# Altium PCB Test.PcbDoc (part 8 of 9)
Units mm, origin at the board's own origin, x right, y up, seen from the top; angles counter-clockwise.
Board outline 152.4 x 101.6 mm, 2 copper layers (Top Layer, Bottom Layer); 1 components, 0 nets, 1713 pads, 1 vias.
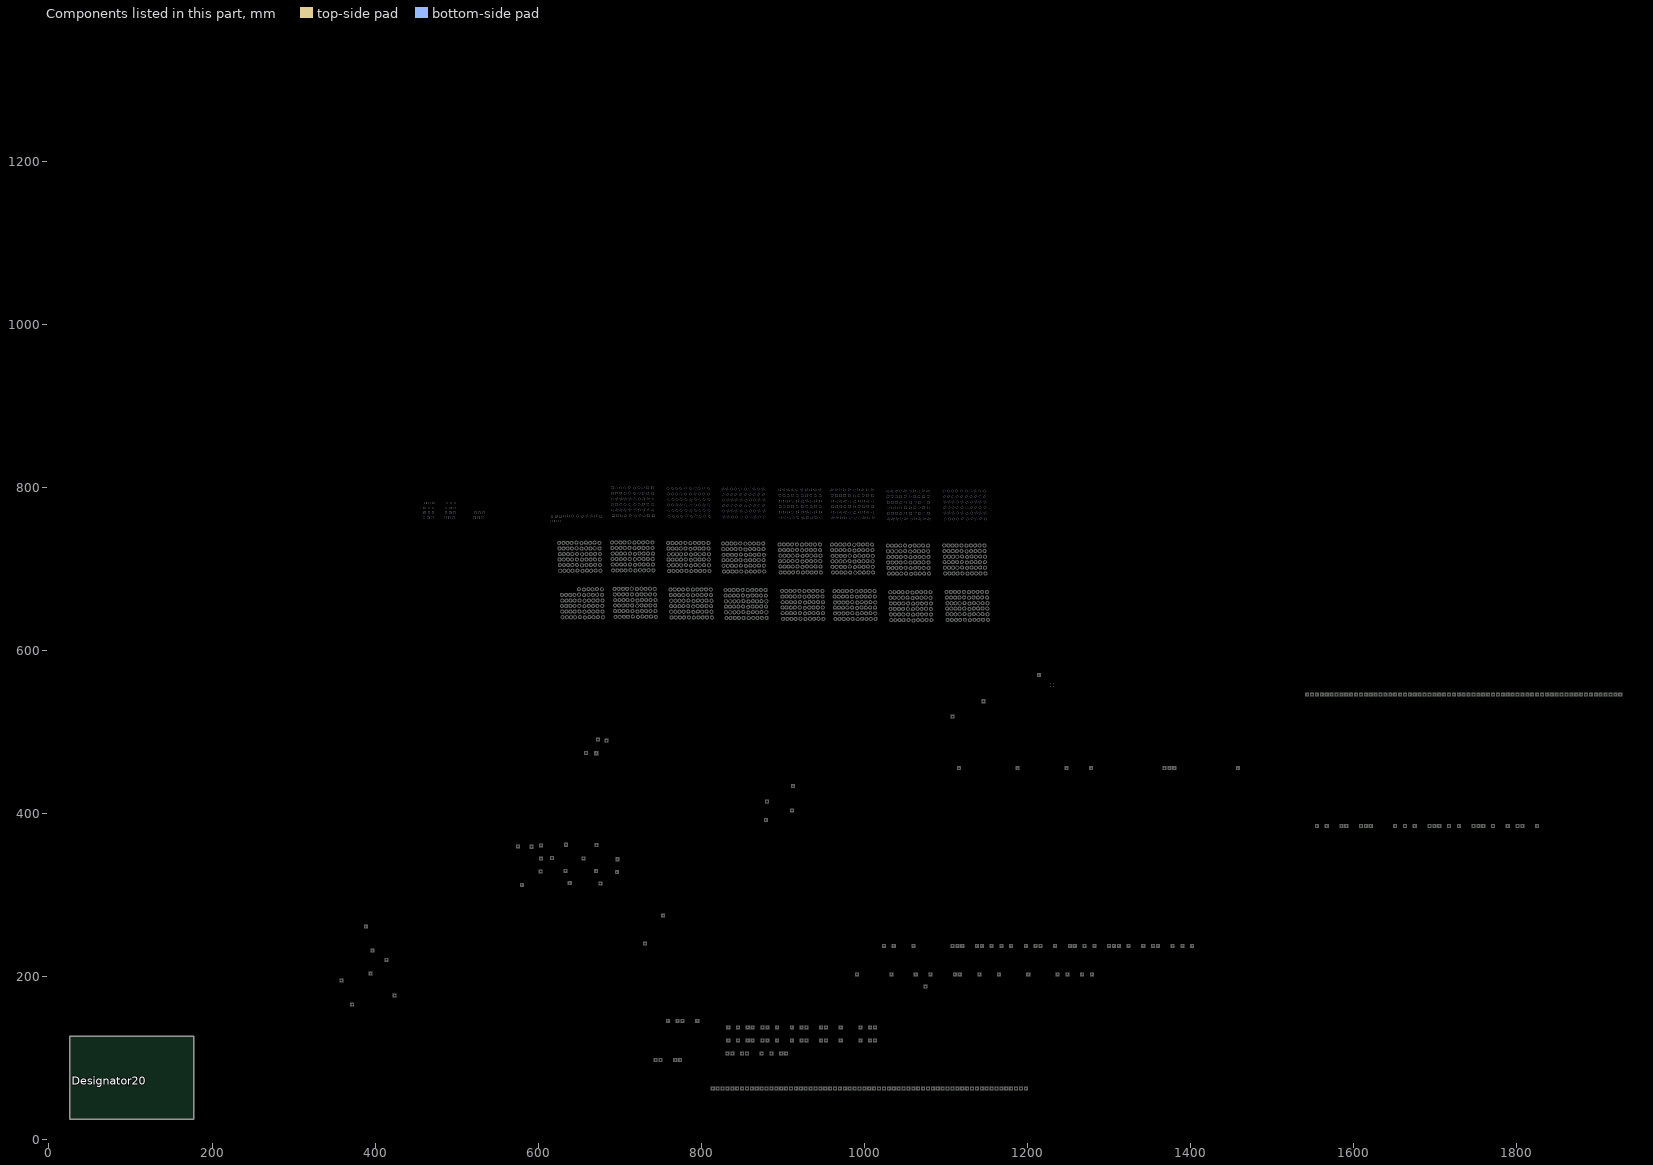
[diagram p8: the components of this part, seen from the top]

## Via types
v1: diameter 0.9, hole 0.4, Top Layer to Bottom Layer, 1 vias

## Nets (pads, with @x,y where several pads share a name; then routed paths per layer and width w, separated by ;. In a path a pad name is that pad's centre, name@x,y a point inside that pad or via, vN(x,y) a via of type N, cw(c..) or ccw(c..) an arc to the next point about the centre after c; other vN are vias at no path point) (continued)
copper on no net: (continued)
  Top Layer w0.25: 1223.399,1245.785 1223.493,1244.347 cw(c1222.242,1244.568) 1220.991,1244.789 1221.245,1246.227 cw(c1222.496,1246.006) 1223.747,1245.785 ; 1223.399,1310.815 1220.897,1311.257 1221.339,1313.759 1223.841,1313.317 ; 1223.653,1238.927 1223.747,1237.489 cw(c1222.496,1237.71) 1221.245,1237.931 1221.499,1239.369 cw(c1222.75,1239.148) 1224.001,1238.927 ; 1223.653,1252.389 1223.747,1250.951 cw(c1222.496,1251.172) 1221.245,1251.393 1221.499,1252.831 cw(c1222.75,1252.61) 1224.001,1252.389 ; 1223.653,1303.957 1221.151,1304.399 1221.593,1306.901 1224.095,1306.459 ; 1223.653,1317.419 1221.151,1317.861 1221.593,1320.363 1224.095,1319.921 ; 1224.161,1231.942 1224.255,1230.504 cw(c1223.004,1230.725) 1221.753,1230.946 1222.007,1232.384 cw(c1223.258,1232.163) 1224.509,1231.942 ; 1224.161,1296.972 1221.659,1297.414 1222.101,1299.916 1224.603,1299.474 ; 1225.891,1209.232 1225.985,1207.794 cw(c1224.734,1208.015) 1223.483,1208.236 1223.737,1209.674 cw(c1224.988,1209.453) 1226.239,1209.232 ; 1226.145,1202.374 1226.239,1200.936 cw(c1224.988,1201.157) 1223.737,1201.378 1223.991,1202.816 cw(c1225.242,1202.595) 1226.493,1202.374 ; 1226.399,1188.785 1226.493,1187.347 cw(c1225.242,1187.568) 1223.991,1187.789 1224.245,1189.227 cw(c1225.496,1189.006) 1226.747,1188.785 ; 1226.653,1181.927 1226.747,1180.489 cw(c1225.496,1180.71) 1224.245,1180.931 1224.499,1182.369 cw(c1225.75,1182.148) 1227.001,1181.927 ; 1226.653,1195.389 1226.747,1193.951 cw(c1225.496,1194.172) 1224.245,1194.393 1224.499,1195.831 cw(c1225.75,1195.61) 1227.001,1195.389 ; 1226.941,1331.483 1226.941,1333.985 ; 1227.161,1174.942 1227.255,1173.504 cw(c1226.004,1173.725) 1224.753,1173.946 1225.007,1175.384 cw(c1226.258,1175.163) 1227.509,1174.942 ; 1227.195,1324.625 1227.195,1327.127 ; 1227.449,1311.036 1227.449,1313.538 ; 1227.703,1304.178 1227.703,1306.68 ; 1227.703,1317.64 1227.703,1320.142 ; 1227.971,1266.232 1228.065,1264.794 cw(c1226.814,1265.015) 1225.563,1265.236 1225.817,1266.674 cw(c1227.068,1266.453) 1228.319,1266.232 ; 1227.971,1331.262 1225.469,1331.704 1225.911,1334.206 1228.413,1333.764 ; 1228.211,1297.193 1228.211,1299.695 ; 1228.225,1259.374 1228.319,1257.936 cw(c1227.068,1258.157) 1225.817,1258.378 1226.071,1259.816 cw(c1227.322,1259.595) 1228.573,1259.374 ; 1228.225,1324.404 1225.723,1324.846 1226.165,1327.348 1228.667,1326.906 ; 1228.479,1245.785 1228.573,1244.347 cw(c1227.322,1244.568) 1226.071,1244.789 1226.325,1246.227 cw(c1227.576,1246.006) 1228.827,1245.785 ; 1228.479,1310.815 1225.977,1311.257 1226.419,1313.759 1228.921,1313.317 ; 1228.733,1238.927 1228.827,1237.489 cw(c1227.576,1237.71) 1226.325,1237.931 1226.579,1239.369 cw(c1227.83,1239.148) 1229.081,1238.927 ; 1228.733,1252.389 1228.827,1250.951 cw(c1227.576,1251.172) 1226.325,1251.393 1226.579,1252.831 cw(c1227.83,1252.61) 1229.081,1252.389 ; 1228.733,1303.957 1226.231,1304.399 1226.673,1306.901 1229.175,1306.459 ; 1228.733,1317.419 1226.231,1317.861 1226.673,1320.363 1229.175,1319.921 ; 1229.241,1231.942 1229.335,1230.504 cw(c1228.084,1230.725) 1226.833,1230.946 1227.087,1232.384 cw(c1228.338,1232.163) 1229.589,1231.942 ; 1229.241,1296.972 1226.739,1297.414 1227.181,1299.916 1229.683,1299.474 ; 1230.971,1209.232 1231.065,1207.794 cw(c1229.814,1208.015) 1228.563,1208.236 1228.817,1209.674 cw(c1230.068,1209.453) 1231.319,1209.232 ; 1231.225,1202.374 1231.319,1200.936 cw(c1230.068,1201.157) 1228.817,1201.378 1229.071,1202.816 cw(c1230.322,1202.595) 1231.573,1202.374 ; 1231.479,1188.785 1231.573,1187.347 cw(c1230.322,1187.568) 1229.071,1187.789 1229.325,1189.227 cw(c1230.576,1189.006) 1231.827,1188.785 ; 1231.733,1181.927 1231.827,1180.489 cw(c1230.576,1180.71) 1229.325,1180.931 1229.579,1182.369 cw(c1230.83,1182.148) 1232.081,1181.927 ; 1231.733,1195.389 1231.827,1193.951 cw(c1230.576,1194.172) 1229.325,1194.393 1229.579,1195.831 cw(c1230.83,1195.61) 1232.081,1195.389 ; 1232.241,1174.942 1232.335,1173.504 cw(c1231.084,1173.725) 1229.833,1173.946 1230.087,1175.384 cw(c1231.338,1175.163) 1232.589,1174.942 ; 1232.783,1331.61 1232.783,1334.112 ; 1233.037,1324.752 1233.037,1327.254 ; 1233.291,1311.163 1233.291,1313.665 ; 1233.545,1304.305 1233.545,1306.807 ; 1233.545,1317.767 1233.545,1320.269 ; 1233.813,1266.359 1233.907,1264.921 cw(c1232.656,1265.142) 1231.405,1265.363 1231.659,1266.801 cw(c1232.91,1266.58) 1234.161,1266.359 ; 1233.813,1331.389 1231.311,1331.831 1231.753,1334.333 1234.255,1333.891 ; 1234.053,1297.32 1234.053,1299.822 ; 1234.067,1259.501 1234.161,1258.063 cw(c1232.91,1258.284) 1231.659,1258.505 1231.913,1259.943 cw(c1233.164,1259.722) 1234.415,1259.501 ; 1234.067,1324.531 1231.565,1324.973 1232.007,1327.475 1234.509,1327.033 ; 1234.321,1245.912 1234.415,1244.474 cw(c1233.164,1244.695) 1231.913,1244.916 1232.167,1246.354 cw(c1233.418,1246.133) 1234.669,1245.912 ; 1234.321,1310.942 1231.819,1311.384 1232.261,1313.886 1234.763,1313.444 ; 1234.575,1239.054 1234.669,1237.616 cw(c1233.418,1237.837) 1232.167,1238.058 1232.421,1239.496 cw(c1233.672,1239.275) 1234.923,1239.054 ; 1234.575,1252.516 1234.669,1251.078 cw(c1233.418,1251.299) 1232.167,1251.52 1232.421,1252.958 cw(c1233.672,1252.737) 1234.923,1252.516 ; 1234.575,1304.084 1232.073,1304.526 1232.515,1307.028 1235.017,1306.586 ; 1234.575,1317.546 1232.073,1317.988 1232.515,1320.49 1235.017,1320.048 ; 1235.083,1232.069 1235.177,1230.631 cw(c1233.926,1230.852) 1232.675,1231.073 1232.929,1232.511 cw(c1234.18,1232.29) 1235.431,1232.069 ; 1235.083,1297.099 1232.581,1297.541 1233.023,1300.043 1235.525,1299.601 ; 1236.813,1209.359 1236.907,1207.921 cw(c1235.656,1208.142) 1234.405,1208.363 1234.659,1209.801 cw(c1235.91,1209.58) 1237.161,1209.359 ; 1237.067,1202.501 1237.161,1201.063 cw(c1235.91,1201.284) 1234.659,1201.505 1234.913,1202.943 cw(c1236.164,1202.722) 1237.415,1202.501 ; 1237.321,1188.912 1237.415,1187.474 cw(c1236.164,1187.695) 1234.913,1187.916 1235.167,1189.354 cw(c1236.418,1189.133) 1237.669,1188.912 ; 1237.575,1182.054 1237.669,1180.616 cw(c1236.418,1180.837) 1235.167,1181.058 1235.421,1182.496 cw(c1236.672,1182.275) 1237.923,1182.054 ; 1237.575,1195.516 1237.669,1194.078 cw(c1236.418,1194.299) 1235.167,1194.52 1235.421,1195.958 cw(c1236.672,1195.737) 1237.923,1195.516 ; 1238.083,1175.069 1238.177,1173.631 cw(c1236.926,1173.852) 1235.675,1174.073 1235.929,1175.511 cw(c1237.18,1175.29) 1238.431,1175.069 ; 1239.006,1331.229 1239.006,1333.731 ; 1239.26,1324.371 1239.26,1326.873 ; 1239.514,1310.782 1239.514,1313.284 ; 1239.768,1303.924 1239.768,1306.426 ; 1239.768,1317.386 1239.768,1319.888 ; 1240.036,1265.978 1240.13,1264.54 cw(c1238.879,1264.761) 1237.628,1264.982 1237.882,1266.42 cw(c1239.133,1266.199) 1240.384,1265.978 ; 1240.036,1331.008 1237.534,1331.45 1237.976,1333.952 1240.478,1333.51 ; 1240.276,1296.939 1240.276,1299.441 ; 1240.29,1259.12 1240.384,1257.682 cw(c1239.133,1257.903) 1237.882,1258.124 1238.136,1259.562 cw(c1239.387,1259.341) 1240.638,1259.12 ; 1240.29,1324.15 1237.788,1324.592 1238.23,1327.094 1240.732,1326.652 ; 1240.544,1245.531 1240.638,1244.093 cw(c1239.387,1244.314) 1238.136,1244.535 1238.39,1245.973 cw(c1239.641,1245.752) 1240.892,1245.531 ; 1240.544,1310.561 1238.042,1311.003 1238.484,1313.505 1240.986,1313.063 ; 1240.798,1238.673 1240.892,1237.235 cw(c1239.641,1237.456) 1238.39,1237.677 1238.644,1239.115 cw(c1239.895,1238.894) 1241.146,1238.673 ; 1240.798,1252.135 1240.892,1250.697 cw(c1239.641,1250.918) 1238.39,1251.139 1238.644,1252.577 cw(c1239.895,1252.356) 1241.146,1252.135 ; 1240.798,1303.703 1238.296,1304.145 1238.738,1306.647 1241.24,1306.205 ; 1240.798,1317.165 1238.296,1317.607 1238.738,1320.109 1241.24,1319.667 ; 1241.306,1231.688 1241.4,1230.25 cw(c1240.149,1230.471) 1238.898,1230.692 1239.152,1232.13 cw(c1240.403,1231.909) 1241.654,1231.688 ; 1241.306,1296.718 1238.804,1297.16 1239.246,1299.662 1241.748,1299.22 ; 1243.036,1208.978 1243.13,1207.54 cw(c1241.879,1207.761) 1240.628,1207.982 1240.882,1209.42 cw(c1242.133,1209.199) 1243.384,1208.978 ; 1243.29,1202.12 1243.384,1200.682 cw(c1242.133,1200.903) 1240.882,1201.124 1241.136,1202.562 cw(c1242.387,1202.341) 1243.638,1202.12 ; 1243.544,1188.531 1243.638,1187.093 cw(c1242.387,1187.314) 1241.136,1187.535 1241.39,1188.973 cw(c1242.641,1188.752) 1243.892,1188.531 ; 1243.798,1181.673 1243.892,1180.235 cw(c1242.641,1180.456) 1241.39,1180.677 1241.644,1182.115 cw(c1242.895,1181.894) 1244.146,1181.673 ; 1243.798,1195.135 1243.892,1193.697 cw(c1242.641,1193.918) 1241.39,1194.139 1241.644,1195.577 cw(c1242.895,1195.356) 1244.146,1195.135 ; 1244.306,1174.688 1244.4,1173.25 cw(c1243.149,1173.471) 1241.898,1173.692 1242.152,1175.13 cw(c1243.403,1174.909) 1244.654,1174.688 ; 1244.467,1331.61 1244.467,1334.112 ; 1244.721,1324.752 1244.721,1327.254 ; 1244.975,1311.163 1244.975,1313.665 ; 1245.229,1304.305 1245.229,1306.807 ; 1245.229,1317.767 1245.229,1320.269 ; 1245.497,1266.359 1245.591,1264.921 cw(c1244.34,1265.142) 1243.089,1265.363 1243.343,1266.801 cw(c1244.594,1266.58) 1245.845,1266.359 ; 1245.497,1331.389 1242.995,1331.831 1243.437,1334.333 1245.939,1333.891 ; 1245.737,1297.32 1245.737,1299.822 ; 1245.751,1259.501 1245.845,1258.063 cw(c1244.594,1258.284) 1243.343,1258.505 1243.597,1259.943 cw(c1244.848,1259.722) 1246.099,1259.501 ; 1245.751,1324.531 1243.249,1324.973 1243.691,1327.475 1246.193,1327.033 ; 1246.005,1245.912 1246.099,1244.474 cw(c1244.848,1244.695) 1243.597,1244.916 1243.851,1246.354 cw(c1245.102,1246.133) 1246.353,1245.912 ; 1246.005,1310.942 1243.503,1311.384 1243.945,1313.886 1246.447,1313.444 ; 1246.259,1239.054 1246.353,1237.616 cw(c1245.102,1237.837) 1243.851,1238.058 1244.105,1239.496 cw(c1245.356,1239.275) 1246.607,1239.054 ; 1246.259,1252.516 1246.353,1251.078 cw(c1245.102,1251.299) 1243.851,1251.52 1244.105,1252.958 cw(c1245.356,1252.737) 1246.607,1252.516 ; 1246.259,1304.084 1243.757,1304.526 1244.199,1307.028 1246.701,1306.586 ; 1246.259,1317.546 1243.757,1317.988 1244.199,1320.49 1246.701,1320.048 ; 1246.767,1232.069 1246.861,1230.631 cw(c1245.61,1230.852) 1244.359,1231.073 1244.613,1232.511 cw(c1245.864,1232.29) 1247.115,1232.069 ; 1246.767,1297.099 1244.265,1297.541 1244.707,1300.043 1247.209,1299.601 ; 1248.497,1209.359 1248.591,1207.921 cw(c1247.34,1208.142) 1246.089,1208.363 1246.343,1209.801 cw(c1247.594,1209.58) 1248.845,1209.359 ; 1248.751,1202.501 1248.845,1201.063 cw(c1247.594,1201.284) 1246.343,1201.505 1246.597,1202.943 cw(c1247.848,1202.722) 1249.099,1202.501 ; 1249.005,1188.912 1249.099,1187.474 cw(c1247.848,1187.695) 1246.597,1187.916 1246.851,1189.354 cw(c1248.102,1189.133) 1249.353,1188.912 ; 1249.259,1182.054 1249.353,1180.616 cw(c1248.102,1180.837) 1246.851,1181.058 1247.105,1182.496 cw(c1248.356,1182.275) 1249.607,1182.054 ; 1249.259,1195.516 1249.353,1194.078 cw(c1248.102,1194.299) 1246.851,1194.52 1247.105,1195.958 cw(c1248.356,1195.737) 1249.607,1195.516 ; 1249.674,1331.483 1249.674,1333.985 ; 1249.767,1175.069 1249.861,1173.631 cw(c1248.61,1173.852) 1247.359,1174.073 1247.613,1175.511 cw(c1248.864,1175.29) 1250.115,1175.069 ; 1249.928,1324.625 1249.928,1327.127 ; 1250.182,1311.036 1250.182,1313.538 ; 1250.436,1304.178 1250.436,1306.68 ; 1250.436,1317.64 1250.436,1320.142 ; 1250.704,1266.232 1250.798,1264.794 cw(c1249.547,1265.015) 1248.296,1265.236 1248.55,1266.674 cw(c1249.801,1266.453) 1251.052,1266.232 ; 1250.704,1331.262 1248.202,1331.704 1248.644,1334.206 1251.146,1333.764 ; 1250.944,1297.193 1250.944,1299.695 ; 1250.958,1259.374 1251.052,1257.936 cw(c1249.801,1258.157) 1248.55,1258.378 1248.804,1259.816 cw(c1250.055,1259.595) 1251.306,1259.374 ; 1250.958,1324.404 1248.456,1324.846 1248.898,1327.348 1251.4,1326.906 ; 1251.212,1245.785 1251.306,1244.347 cw(c1250.055,1244.568) 1248.804,1244.789 1249.058,1246.227 cw(c1250.309,1246.006) 1251.56,1245.785 ; 1251.212,1310.815 1248.71,1311.257 1249.152,1313.759 1251.654,1313.317 ; 1251.466,1238.927 1251.56,1237.489 cw(c1250.309,1237.71) 1249.058,1237.931 1249.312,1239.369 cw(c1250.563,1239.148) 1251.814,1238.927 ; 1251.466,1252.389 1251.56,1250.951 cw(c1250.309,1251.172) 1249.058,1251.393 1249.312,1252.831 cw(c1250.563,1252.61) 1251.814,1252.389 ; 1251.466,1303.957 1248.964,1304.399 1249.406,1306.901 1251.908,1306.459 ; 1251.466,1317.419 1248.964,1317.861 1249.406,1320.363 1251.908,1319.921 ; 1251.974,1231.942 1252.068,1230.504 cw(c1250.817,1230.725) 1249.566,1230.946 1249.82,1232.384 cw(c1251.071,1232.163) 1252.322,1231.942 ; 1251.974,1296.972 1249.472,1297.414 1249.914,1299.916 1252.416,1299.474 ; 1253.704,1209.232 1253.798,1207.794 cw(c1252.547,1208.015) 1251.296,1208.236 1251.55,1209.674 cw(c1252.801,1209.453) 1254.052,1209.232 ; 1253.958,1202.374 1254.052,1200.936 cw(c1252.801,1201.157) 1251.55,1201.378 1251.804,1202.816 cw(c1253.055,1202.595) 1254.306,1202.374 ; 1254.212,1188.785 1254.306,1187.347 cw(c1253.055,1187.568) 1251.804,1187.789 1252.058,1189.227 cw(c1253.309,1189.006) 1254.56,1188.785 ; 1254.466,1181.927 1254.56,1180.489 cw(c1253.309,1180.71) 1252.058,1180.931 1252.312,1182.369 cw(c1253.563,1182.148) 1254.814,1181.927 ; 1254.466,1195.389 1254.56,1193.951 cw(c1253.309,1194.172) 1252.058,1194.393 1252.312,1195.831 cw(c1253.563,1195.61) 1254.814,1195.389 ; 1254.974,1174.942 1255.068,1173.504 cw(c1253.817,1173.725) 1252.566,1173.946 1252.82,1175.384 cw(c1254.071,1175.163) 1255.322,1174.942 ; 1255.008,1331.61 1255.008,1334.112 ; 1255.262,1324.752 1255.262,1327.254 ; 1255.516,1311.163 1255.516,1313.665 ; 1255.77,1304.305 1255.77,1306.807 ; 1255.77,1317.767 1255.77,1320.269 ; 1256.038,1266.359 1256.132,1264.921 cw(c1254.881,1265.142) 1253.63,1265.363 1253.884,1266.801 cw(c1255.135,1266.58) 1256.386,1266.359 ; 1256.038,1331.389 1253.536,1331.831 1253.978,1334.333 1256.48,1333.891 ; 1256.278,1297.32 1256.278,1299.822 ; 1256.292,1259.501 1256.386,1258.063 cw(c1255.135,1258.284) 1253.884,1258.505 1254.138,1259.943 cw(c1255.389,1259.722) 1256.64,1259.501 ; 1256.292,1324.531 1253.79,1324.973 1254.232,1327.475 1256.734,1327.033 ; 1256.546,1245.912 1256.64,1244.474 cw(c1255.389,1244.695) 1254.138,1244.916 1254.392,1246.354 cw(c1255.643,1246.133) 1256.894,1245.912 ; 1256.546,1310.942 1254.044,1311.384 1254.486,1313.886 1256.988,1313.444 ; 1256.8,1239.054 1256.894,1237.616 cw(c1255.643,1237.837) 1254.392,1238.058 1254.646,1239.496 cw(c1255.897,1239.275) 1257.148,1239.054 ; 1256.8,1252.516 1256.894,1251.078 cw(c1255.643,1251.299) 1254.392,1251.52 1254.646,1252.958 cw(c1255.897,1252.737) 1257.148,1252.516 ; 1256.8,1304.084 1254.298,1304.526 1254.74,1307.028 1257.242,1306.586 ; 1256.8,1317.546 1254.298,1317.988 1254.74,1320.49 1257.242,1320.048 ; 1257.308,1232.069 1257.402,1230.631 cw(c1256.151,1230.852) 1254.9,1231.073 1255.154,1232.511 cw(c1256.405,1232.29) 1257.656,1232.069 ; 1257.308,1297.099 1254.806,1297.541 1255.248,1300.043 1257.75,1299.601 ; 1259.038,1209.359 1259.132,1207.921 cw(c1257.881,1208.142) 1256.63,1208.363 1256.884,1209.801 cw(c1258.135,1209.58) 1259.386,1209.359 ; 1259.292,1202.501 1259.386,1201.063 cw(c1258.135,1201.284) 1256.884,1201.505 1257.138,1202.943 cw(c1258.389,1202.722) 1259.64,1202.501 ; 1259.546,1188.912 1259.64,1187.474 cw(c1258.389,1187.695) 1257.138,1187.916 1257.392,1189.354 cw(c1258.643,1189.133) 1259.894,1188.912 ; 1259.8,1182.054 1259.894,1180.616 cw(c1258.643,1180.837) 1257.392,1181.058 1257.646,1182.496 cw(c1258.897,1182.275) 1260.148,1182.054 ; 1259.8,1195.516 1259.894,1194.078 cw(c1258.643,1194.299) 1257.392,1194.52 1257.646,1195.958 cw(c1258.897,1195.737) 1260.148,1195.516 ; 1260.308,1175.069 1260.402,1173.631 cw(c1259.151,1173.852) 1257.9,1174.073 1258.154,1175.511 cw(c1259.405,1175.29) 1260.656,1175.069 ; 1260.977,1331.483 1260.977,1333.985 ; 1261.231,1324.625 1261.231,1327.127 ; 1261.485,1311.036 1261.485,1313.538 ; 1261.739,1304.178 1261.739,1306.68 ; 1261.739,1317.64 1261.739,1320.142 ; 1262.007,1266.232 1262.101,1264.794 cw(c1260.85,1265.015) 1259.599,1265.236 1259.853,1266.674 cw(c1261.104,1266.453) 1262.355,1266.232 ; 1262.007,1331.262 1259.505,1331.704 1259.947,1334.206 1262.449,1333.764 ; 1262.247,1297.193 1262.247,1299.695 ; 1262.261,1259.374 1262.355,1257.936 cw(c1261.104,1258.157) 1259.853,1258.378 1260.107,1259.816 cw(c1261.358,1259.595) 1262.609,1259.374 ; 1262.261,1324.404 1259.759,1324.846 1260.201,1327.348 1262.703,1326.906 ; 1262.515,1245.785 1262.609,1244.347 cw(c1261.358,1244.568) 1260.107,1244.789 1260.361,1246.227 cw(c1261.612,1246.006) 1262.863,1245.785 ; 1262.515,1310.815 1260.013,1311.257 1260.455,1313.759 1262.957,1313.317 ; 1262.769,1238.927 1262.863,1237.489 cw(c1261.612,1237.71) 1260.361,1237.931 1260.615,1239.369 cw(c1261.866,1239.148) 1263.117,1238.927 ; 1262.769,1252.389 1262.863,1250.951 cw(c1261.612,1251.172) 1260.361,1251.393 1260.615,1252.831 cw(c1261.866,1252.61) 1263.117,1252.389 ; 1262.769,1303.957 1260.267,1304.399 1260.709,1306.901 1263.211,1306.459 ; 1262.769,1317.419 1260.267,1317.861 1260.709,1320.363 1263.211,1319.921 ; 1263.277,1231.942 1263.371,1230.504 cw(c1262.12,1230.725) 1260.869,1230.946 1261.123,1232.384 cw(c1262.374,1232.163) 1263.625,1231.942 ; 1263.277,1296.972 1260.775,1297.414 1261.217,1299.916 1263.719,1299.474 ; 1265.007,1209.232 1265.101,1207.794 cw(c1263.85,1208.015) 1262.599,1208.236 1262.853,1209.674 cw(c1264.104,1209.453) 1265.355,1209.232 ; 1265.261,1202.374 1265.355,1200.936 cw(c1264.104,1201.157) 1262.853,1201.378 1263.107,1202.816 cw(c1264.358,1202.595) 1265.609,1202.374 ; 1265.515,1188.785 1265.609,1187.347 cw(c1264.358,1187.568) 1263.107,1187.789 1263.361,1189.227 cw(c1264.612,1189.006) 1265.863,1188.785 ; 1265.769,1181.927 1265.863,1180.489 cw(c1264.612,1180.71) 1263.361,1180.931 1263.615,1182.369 cw(c1264.866,1182.148) 1266.117,1181.927 ; 1265.769,1195.389 1265.863,1193.951 cw(c1264.612,1194.172) 1263.361,1194.393 1263.615,1195.831 cw(c1264.866,1195.61) 1266.117,1195.389 ; 1266.277,1174.942 1266.371,1173.504 cw(c1265.12,1173.725) 1263.869,1173.946 1264.123,1175.384 cw(c1265.374,1175.163) 1266.625,1174.942 ; 1279.163,1333.379 1280.525,1331.235 1282.669,1332.597 1281.307,1334.741 ; 1279.417,1326.521 1280.779,1324.377 1282.923,1325.739 1281.561,1327.883 ; 1279.619,1266.669 ccw(c1280.3,1265.597) 1280.981,1264.524 1282.213,1265.308 ccw(c1281.532,1266.379) 1280.851,1267.452 1281.307,1266.668 ; 1279.671,1312.932 1281.033,1310.788 1283.177,1312.15 1281.815,1314.294 ; 1279.873,1259.811 ccw(c1280.554,1258.739) 1281.235,1257.666 1282.467,1258.45 ccw(c1281.786,1259.521) 1281.105,1260.594 1281.561,1259.81 ; 1279.925,1306.074 1281.287,1303.93 1283.431,1305.292 1282.069,1307.436 ; 1279.925,1319.536 1281.287,1317.392 1283.431,1318.754 1282.069,1320.898 ; 1280.127,1246.222 ccw(c1280.808,1245.15) 1281.489,1244.077 1282.721,1244.861 ccw(c1282.04,1245.932) 1281.359,1247.005 1281.815,1246.221 ; 1280.381,1239.364 ccw(c1281.062,1238.292) 1281.743,1237.219 1282.975,1238.003 ccw(c1282.294,1239.074) 1281.613,1240.147 1282.069,1239.363 ; 1280.381,1252.826 ccw(c1281.062,1251.754) 1281.743,1250.681 1282.975,1251.465 ccw(c1282.294,1252.536) 1281.613,1253.609 1282.069,1252.825 ; 1280.433,1299.089 1281.795,1296.945 1283.939,1298.307 1282.577,1300.451 ; 1280.889,1232.379 ccw(c1281.57,1231.307) 1282.251,1230.234 1283.483,1231.018 ccw(c1282.802,1232.089) 1282.121,1233.162 1282.577,1232.378 ; 1280.916,1332.307 1280.916,1333.669 ; 1281.17,1325.449 1281.17,1326.811 ; 1281.424,1311.86 1281.424,1313.222 ; 1281.678,1305.002 1281.678,1306.364 ; 1281.678,1318.464 1281.678,1319.826 ; 1282.186,1298.017 1282.186,1299.379 ; 1282.619,1209.669 ccw(c1283.3,1208.597) 1283.981,1207.524 ; 1282.873,1202.811 ccw(c1283.554,1201.739) 1284.235,1200.666 ; 1283.127,1189.222 ccw(c1283.808,1188.15) 1284.489,1187.077 ; 1283.381,1182.364 ccw(c1284.062,1181.292) 1284.743,1180.219 ; 1283.381,1195.826 ccw(c1284.062,1194.754) 1284.743,1193.681 ; 1283.889,1175.379 ccw(c1284.57,1174.307) 1285.251,1173.234 ; 1283.981,1207.525 1285.213,1208.308 ccw(c1284.532,1209.379) 1283.851,1210.452 1284.307,1209.668 ; 1284.235,1200.667 1285.467,1201.45 ccw(c1284.786,1202.521) 1284.105,1203.594 1284.561,1202.81 ; 1284.243,1333.379 1285.605,1331.235 1287.749,1332.597 1286.387,1334.741 ; 1284.489,1187.078 1285.721,1187.861 ccw(c1285.04,1188.932) 1284.359,1190.005 1284.815,1189.221 ; 1284.497,1326.521 1285.859,1324.377 1288.003,1325.739 1286.641,1327.883 ; 1284.699,1266.669 ccw(c1285.38,1265.597) 1286.061,1264.524 1287.293,1265.308 ccw(c1286.612,1266.379) 1285.931,1267.452 1286.387,1266.668 ; 1284.743,1180.22 1285.975,1181.003 ccw(c1285.294,1182.074) 1284.613,1183.147 1285.069,1182.363 ; 1284.743,1193.682 1285.975,1194.465 ccw(c1285.294,1195.536) 1284.613,1196.609 1285.069,1195.825 ; 1284.751,1312.932 1286.113,1310.788 1288.257,1312.15 1286.895,1314.294 ; 1284.953,1259.811 ccw(c1285.634,1258.739) 1286.315,1257.666 1287.547,1258.45 ccw(c1286.866,1259.521) 1286.185,1260.594 1286.641,1259.81 ; 1285.005,1306.074 1286.367,1303.93 1288.511,1305.292 1287.149,1307.436 ; 1285.005,1319.536 1286.367,1317.392 1288.511,1318.754 1287.149,1320.898 ; 1285.207,1246.222 ccw(c1285.888,1245.15) 1286.569,1244.077 1287.801,1244.861 ccw(c1287.12,1245.932) 1286.439,1247.005 1286.895,1246.221 ; 1285.251,1173.235 1286.483,1174.018 ccw(c1285.802,1175.089) 1285.121,1176.162 1285.577,1175.378 ; 1285.461,1239.364 ccw(c1286.142,1238.292) 1286.823,1237.219 1288.055,1238.003 ccw(c1287.374,1239.074) 1286.693,1240.147 1287.149,1239.363 ; 1285.461,1252.826 ccw(c1286.142,1251.754) 1286.823,1250.681 1288.055,1251.465 ccw(c1287.374,1252.536) 1286.693,1253.609 1287.149,1252.825 ; 1285.513,1299.089 1286.875,1296.945 1289.019,1298.307 1287.657,1300.451 ; 1285.969,1232.379 ccw(c1286.65,1231.307) 1287.331,1230.234 1288.563,1231.018 ccw(c1287.882,1232.089) 1287.201,1233.162 1287.657,1232.378 ; 1285.996,1332.307 1285.996,1333.669 ; 1286.25,1325.449 1286.25,1326.811 ; 1286.504,1311.86 1286.504,1313.222 ; 1286.758,1305.002 1286.758,1306.364 ; 1286.758,1318.464 1286.758,1319.826 ; 1287.266,1298.017 1287.266,1299.379 ; 1287.699,1209.669 ccw(c1288.38,1208.597) 1289.061,1207.524 ; 1287.953,1202.811 ccw(c1288.634,1201.739) 1289.315,1200.666 ; 1288.207,1189.222 ccw(c1288.888,1188.15) 1289.569,1187.077 ; 1288.461,1182.364 ccw(c1289.142,1181.292) 1289.823,1180.219 ; 1288.461,1195.826 ccw(c1289.142,1194.754) 1289.823,1193.681 ; 1288.969,1175.379 ccw(c1289.65,1174.307) 1290.331,1173.234 ; 1289.061,1207.525 1290.293,1208.308 ccw(c1289.612,1209.379) 1288.931,1210.452 1289.387,1209.668 ; 1289.315,1200.667 1290.547,1201.45 ccw(c1289.866,1202.521) 1289.185,1203.594 1289.641,1202.81 ; 1289.323,1333.379 1290.685,1331.235 1292.829,1332.597 1291.467,1334.741 ; 1289.569,1187.078 1290.801,1187.861 ccw(c1290.12,1188.932) 1289.439,1190.005 1289.895,1189.221 ; 1289.577,1326.521 1290.939,1324.377 1293.083,1325.739 1291.721,1327.883 ; 1289.779,1266.669 ccw(c1290.46,1265.597) 1291.141,1264.524 1292.373,1265.308 ccw(c1291.692,1266.379) 1291.011,1267.452 1291.467,1266.668 ; 1289.823,1180.22 1291.055,1181.003 ccw(c1290.374,1182.074) 1289.693,1183.147 1290.149,1182.363 ; 1289.823,1193.682 1291.055,1194.465 ccw(c1290.374,1195.536) 1289.693,1196.609 1290.149,1195.825 ; 1289.831,1312.932 1291.193,1310.788 1293.337,1312.15 1291.975,1314.294 ; 1290.033,1259.811 ccw(c1290.714,1258.739) 1291.395,1257.666 1292.627,1258.45 ccw(c1291.946,1259.521) 1291.265,1260.594 1291.721,1259.81 ; 1290.085,1306.074 1291.447,1303.93 1293.591,1305.292 1292.229,1307.436 ; 1290.085,1319.536 1291.447,1317.392 1293.591,1318.754 1292.229,1320.898 ; 1290.287,1246.222 ccw(c1290.968,1245.15) 1291.649,1244.077 1292.881,1244.861 ccw(c1292.2,1245.932) 1291.519,1247.005 1291.975,1246.221 ; 1290.331,1173.235 1291.563,1174.018 ccw(c1290.882,1175.089) 1290.201,1176.162 1290.657,1175.378 ; 1290.541,1239.364 ccw(c1291.222,1238.292) 1291.903,1237.219 1293.135,1238.003 ccw(c1292.454,1239.074) 1291.773,1240.147 1292.229,1239.363 ; 1290.541,1252.826 ccw(c1291.222,1251.754) 1291.903,1250.681 1293.135,1251.465 ccw(c1292.454,1252.536) 1291.773,1253.609 1292.229,1252.825 ; 1290.593,1299.089 1291.955,1296.945 1294.099,1298.307 1292.737,1300.451 ; 1291.049,1232.379 ccw(c1291.73,1231.307) 1292.411,1230.234 1293.643,1231.018 ccw(c1292.962,1232.089) 1292.281,1233.162 1292.737,1232.378 ; 1291.076,1332.307 1291.076,1333.669 ; 1291.33,1325.449 1291.33,1326.811 ; 1291.584,1311.86 1291.584,1313.222 ; 1291.838,1305.002 1291.838,1306.364 ; 1291.838,1318.464 1291.838,1319.826 ; 1292.346,1298.017 1292.346,1299.379 ; 1292.779,1209.669 ccw(c1293.46,1208.597) 1294.141,1207.524 ; 1293.033,1202.811 ccw(c1293.714,1201.739) 1294.395,1200.666 ; 1293.287,1189.222 ccw(c1293.968,1188.15) 1294.649,1187.077 ; 1293.541,1182.364 ccw(c1294.222,1181.292) 1294.903,1180.219 ; 1293.541,1195.826 ccw(c1294.222,1194.754) 1294.903,1193.681 ; 1294.049,1175.379 ccw(c1294.73,1174.307) 1295.411,1173.234 ; 1294.141,1207.525 1295.373,1208.308 ccw(c1294.692,1209.379) 1294.011,1210.452 1294.467,1209.668 ; 1294.395,1200.667 1295.627,1201.45 ccw(c1294.946,1202.521) 1294.265,1203.594 1294.721,1202.81 ; 1294.403,1333.379 1295.765,1331.235 1297.909,1332.597 1296.547,1334.741 ; 1294.649,1187.078 1295.881,1187.861 ccw(c1295.2,1188.932) 1294.519,1190.005 1294.975,1189.221 ; 1294.657,1326.521 1296.019,1324.377 1298.163,1325.739 1296.801,1327.883 ; 1294.859,1266.669 ccw(c1295.54,1265.597) 1296.221,1264.524 1297.453,1265.308 ccw(c1296.772,1266.379) 1296.091,1267.452 1296.547,1266.668 ; 1294.903,1180.22 1296.135,1181.003 ccw(c1295.454,1182.074) 1294.773,1183.147 1295.229,1182.363 ; 1294.903,1193.682 1296.135,1194.465 ccw(c1295.454,1195.536) 1294.773,1196.609 1295.229,1195.825 ; 1294.911,1312.932 1296.273,1310.788 1298.417,1312.15 1297.055,1314.294 ; 1295.113,1259.811 ccw(c1295.794,1258.739) 1296.475,1257.666 1297.707,1258.45 ccw(c1297.026,1259.521) 1296.345,1260.594 1296.801,1259.81 ; 1295.165,1306.074 1296.527,1303.93 1298.671,1305.292 1297.309,1307.436 ; 1295.165,1319.536 1296.527,1317.392 1298.671,1318.754 1297.309,1320.898 ; 1295.367,1246.222 ccw(c1296.048,1245.15) 1296.729,1244.077 1297.961,1244.861 ccw(c1297.28,1245.932) 1296.599,1247.005 1297.055,1246.221 ; 1295.411,1173.235 1296.643,1174.018 ccw(c1295.962,1175.089) 1295.281,1176.162 1295.737,1175.378 ; 1295.621,1239.364 ccw(c1296.302,1238.292) 1296.983,1237.219 1298.215,1238.003 ccw(c1297.534,1239.074) 1296.853,1240.147 1297.309,1239.363 ; 1295.621,1252.826 ccw(c1296.302,1251.754) 1296.983,1250.681 1298.215,1251.465 ccw(c1297.534,1252.536) 1296.853,1253.609 1297.309,1252.825 ; 1295.673,1299.089 1297.035,1296.945 1299.179,1298.307 1297.817,1300.451 ; 1296.129,1232.379 ccw(c1296.81,1231.307) 1297.491,1230.234 1298.723,1231.018 ccw(c1298.042,1232.089) 1297.361,1233.162 1297.817,1232.378 ; 1296.156,1332.307 1296.156,1333.669 ; 1296.41,1325.449 1296.41,1326.811 ; 1296.664,1311.86 1296.664,1313.222 ; 1296.918,1305.002 1296.918,1306.364 ; 1296.918,1318.464 1296.918,1319.826 ; 1297.426,1298.017 1297.426,1299.379 ; 1297.859,1209.669 ccw(c1298.54,1208.597) 1299.221,1207.524 ; 1298.113,1202.811 ccw(c1298.794,1201.739) 1299.475,1200.666 ; 1298.367,1189.222 ccw(c1299.048,1188.15) 1299.729,1187.077 ; 1298.621,1182.364 ccw(c1299.302,1181.292) 1299.983,1180.219 ; 1298.621,1195.826 ccw(c1299.302,1194.754) 1299.983,1193.681 ; 1299.129,1175.379 ccw(c1299.81,1174.307) 1300.491,1173.234 ; 1299.221,1207.525 1300.453,1208.308 ccw(c1299.772,1209.379) 1299.091,1210.452 1299.547,1209.668 ; 1299.475,1200.667 1300.707,1201.45 ccw(c1300.026,1202.521) 1299.345,1203.594 1299.801,1202.81 ; 1299.729,1187.078 1300.961,1187.861 ccw(c1300.28,1188.932) 1299.599,1190.005 1300.055,1189.221 ; 1299.983,1180.22 1301.215,1181.003 ccw(c1300.534,1182.074) 1299.853,1183.147 1300.309,1182.363 ; 1299.983,1193.682 1301.215,1194.465 ccw(c1300.534,1195.536) 1299.853,1196.609 1300.309,1195.825 ; 1300.245,1333.506 1301.607,1331.362 1303.751,1332.724 1302.389,1334.868 ; 1300.491,1173.235 1301.723,1174.018 ccw(c1301.042,1175.089) 1300.361,1176.162 1300.817,1175.378 ; 1300.499,1326.648 1301.861,1324.504 1304.005,1325.866 1302.643,1328.01 ; 1300.701,1266.796 ccw(c1301.382,1265.724) 1302.063,1264.651 1303.295,1265.435 ccw(c1302.614,1266.506) 1301.933,1267.579 1302.389,1266.795 ; 1300.753,1313.059 1302.115,1310.915 1304.259,1312.277 1302.897,1314.421 ; 1300.955,1259.938 ccw(c1301.636,1258.866) 1302.317,1257.793 1303.549,1258.577 ccw(c1302.868,1259.648) 1302.187,1260.721 1302.643,1259.937 ; 1301.007,1306.201 1302.369,1304.057 1304.513,1305.419 1303.151,1307.563 ; 1301.007,1319.663 1302.369,1317.519 1304.513,1318.881 1303.151,1321.025 ; 1301.209,1246.349 ccw(c1301.89,1245.277) 1302.571,1244.204 1303.803,1244.988 ccw(c1303.122,1246.059) 1302.441,1247.132 1302.897,1246.348 ; 1301.349,1239.882 ccw(c1302.03,1238.81) 1302.711,1237.738 ; 1301.463,1252.953 ccw(c1302.144,1251.881) 1302.825,1250.808 1304.057,1251.592 ccw(c1303.376,1252.663) 1302.695,1253.736 1303.151,1252.952 ; 1301.515,1299.216 1302.877,1297.072 1305.021,1298.434 1303.659,1300.578 ; 1301.971,1232.506 ccw(c1302.652,1231.434) 1303.333,1230.361 1304.565,1231.145 ccw(c1303.884,1232.216) 1303.203,1233.289 1303.659,1232.505 ; 1301.998,1332.434 1301.998,1333.796 ; 1302.03,1237.54 1303.49,1237.54 ; 1302.252,1325.576 1302.252,1326.938 ; 1302.506,1311.987 1302.506,1313.349 ; 1302.76,1305.129 1302.76,1306.491 ; 1302.76,1318.591 1302.76,1319.953 ; 1302.809,1239.882 cw(c1303.49,1238.81) 1304.171,1237.738 ; 1303.268,1298.144 1303.268,1299.506 ; 1303.49,1240.08 1304.03,1240.08 ; 1303.587,1210.187 ccw(c1304.268,1209.115) 1304.949,1208.043 ; 1303.955,1202.938 ccw(c1304.636,1201.866) 1305.317,1200.793 ; 1304.209,1189.349 ccw(c1304.89,1188.277) 1305.571,1187.204 ; 1304.268,1207.845 1305.728,1207.845 ; 1304.463,1182.491 ccw(c1305.144,1181.419) 1305.825,1180.346 ; 1304.463,1195.953 ccw(c1305.144,1194.881) 1305.825,1193.808 ; 1304.857,1175.897 ccw(c1305.538,1174.825) 1306.219,1173.753 ; 1305.047,1210.187 cw(c1305.728,1209.115) 1306.409,1208.043 ; 1305.317,1200.794 1306.549,1201.577 ccw(c1305.868,1202.648) 1305.187,1203.721 1305.643,1202.937 ; 1305.538,1173.555 1306.998,1173.555 ; 1305.571,1187.205 1306.803,1187.988 ccw(c1306.122,1189.059) 1305.441,1190.132 1305.897,1189.348 ; 1305.728,1210.385 1306.268,1210.385 ; 1305.825,1180.347 1307.057,1181.13 ccw(c1306.376,1182.201) 1305.695,1183.274 1306.151,1182.49 ; 1305.825,1193.809 1307.057,1194.592 ccw(c1306.376,1195.663) 1305.695,1196.736 1306.151,1195.952 ; 1306.317,1175.897 cw(c1306.998,1174.825) 1307.679,1173.753 ; 1306.468,1333.125 1307.83,1330.981 1309.974,1332.343 1308.612,1334.487 ; 1306.722,1326.267 1308.084,1324.123 1310.228,1325.485 1308.866,1327.629 ; 1306.924,1266.415 ccw(c1307.605,1265.343) 1308.286,1264.27 1309.518,1265.054 ccw(c1308.837,1266.125) 1308.156,1267.198 1308.612,1266.414 ; 1306.976,1312.678 1308.338,1310.534 1310.482,1311.896 1309.12,1314.04 ; 1306.998,1176.095 1307.538,1176.095 ; 1307.178,1259.557 ccw(c1307.859,1258.485) 1308.54,1257.412 1309.772,1258.196 ccw(c1309.091,1259.267) 1308.41,1260.34 1308.866,1259.556 ; 1307.23,1305.82 1308.592,1303.676 1310.736,1305.038 1309.374,1307.182 ; 1307.23,1319.282 1308.592,1317.138 1310.736,1318.5 1309.374,1320.644 ; 1307.432,1245.968 ccw(c1308.113,1244.896) 1308.794,1243.823 1310.026,1244.607 ccw(c1309.345,1245.678) 1308.664,1246.751 1309.12,1245.967 ; 1307.572,1239.501 ccw(c1308.253,1238.429) 1308.934,1237.357 ; 1307.686,1252.572 ccw(c1308.367,1251.5) 1309.048,1250.427 1310.28,1251.211 ccw(c1309.599,1252.282) 1308.918,1253.355 1309.374,1252.571 ; 1307.738,1298.835 1309.1,1296.691 1311.244,1298.053 1309.882,1300.197 ; 1308.194,1232.125 ccw(c1308.875,1231.053) 1309.556,1229.98 1310.788,1230.764 ccw(c1310.107,1231.835) 1309.426,1232.908 1309.882,1232.124 ; 1308.221,1332.053 1308.221,1333.415 ; 1308.253,1237.159 1309.713,1237.159 ; 1308.475,1325.195 1308.475,1326.557 ; 1308.729,1311.606 1308.729,1312.968 ; 1308.983,1304.748 1308.983,1306.11 ; 1308.983,1318.21 1308.983,1319.572 ; 1309.032,1239.501 cw(c1309.713,1238.429) 1310.394,1237.357 ; 1309.491,1297.763 1309.491,1299.125 ; 1309.713,1239.699 1310.253,1239.699 ; 1309.924,1209.415 ccw(c1310.605,1208.343) 1311.286,1207.27 ; 1310.178,1202.557 ccw(c1310.859,1201.485) 1311.54,1200.412 ; 1310.432,1188.968 ccw(c1311.113,1187.896) 1311.794,1186.823 ; 1310.686,1182.11 ccw(c1311.367,1181.038) 1312.048,1179.965 ; 1310.686,1195.572 ccw(c1311.367,1194.5) 1312.048,1193.427 ; 1311.194,1175.125 ccw(c1311.875,1174.053) 1312.556,1172.98 ; 1311.286,1207.271 1312.518,1208.054 ccw(c1311.837,1209.125) 1311.156,1210.198 1311.612,1209.414 ; 1311.54,1200.413 1312.772,1201.196 ccw(c1312.091,1202.267) 1311.41,1203.34 1311.866,1202.556 ; 1311.794,1186.824 1313.026,1187.607 ccw(c1312.345,1188.678) 1311.664,1189.751 1312.12,1188.967 ; 1311.929,1333.506 1313.291,1331.362 1315.435,1332.724 1314.073,1334.868 ; 1312.048,1179.966 1313.28,1180.749 ccw(c1312.599,1181.82) 1311.918,1182.893 1312.374,1182.109 ; 1312.048,1193.428 1313.28,1194.211 ccw(c1312.599,1195.282) 1311.918,1196.355 1312.374,1195.571 ; 1312.183,1326.648 1313.545,1324.504 1315.689,1325.866 1314.327,1328.01 ; 1312.385,1266.796 ccw(c1313.066,1265.724) 1313.747,1264.651 1314.979,1265.435 ccw(c1314.298,1266.506) 1313.617,1267.579 1314.073,1266.795 ; 1312.437,1313.059 1313.799,1310.915 1315.943,1312.277 1314.581,1314.421 ; 1312.556,1172.981 1313.788,1173.764 ccw(c1313.107,1174.835) 1312.426,1175.908 1312.882,1175.124 ; 1312.639,1259.938 ccw(c1313.32,1258.866) 1314.001,1257.793 1315.233,1258.577 ccw(c1314.552,1259.648) 1313.871,1260.721 1314.327,1259.937 ; 1312.691,1306.201 1314.053,1304.057 1316.197,1305.419 1314.835,1307.563 ; 1312.691,1319.663 1314.053,1317.519 1316.197,1318.881 1314.835,1321.025 ; 1312.893,1246.349 ccw(c1313.574,1245.277) 1314.255,1244.204 1315.487,1244.988 ccw(c1314.806,1246.059) 1314.125,1247.132 1314.581,1246.348 ; 1313.147,1239.491 ccw(c1313.828,1238.419) 1314.509,1237.346 1315.741,1238.13 ccw(c1315.06,1239.201) 1314.379,1240.274 1314.835,1239.49 ; 1313.147,1252.953 ccw(c1313.828,1251.881) 1314.509,1250.808 1315.741,1251.592 ccw(c1315.06,1252.663) 1314.379,1253.736 1314.835,1252.952 ; 1313.199,1299.216 1314.561,1297.072 1316.705,1298.434 1315.343,1300.578 ; 1313.655,1232.506 ccw(c1314.336,1231.434) 1315.017,1230.361 1316.249,1231.145 ccw(c1315.568,1232.216) 1314.887,1233.289 1315.343,1232.505 ; 1313.682,1332.434 1313.682,1333.796 ; 1313.936,1325.576 1313.936,1326.938 ; 1314.19,1311.987 1314.19,1313.349 ; 1314.444,1305.129 1314.444,1306.491 ; 1314.444,1318.591 1314.444,1319.953 ; 1314.952,1298.144 1314.952,1299.506 ; 1315.385,1209.796 ccw(c1316.066,1208.724) 1316.747,1207.651 ; 1315.639,1202.938 ccw(c1316.32,1201.866) 1317.001,1200.793 ; 1315.893,1189.349 ccw(c1316.574,1188.277) 1317.255,1187.204 ; 1316.147,1182.491 ccw(c1316.828,1181.419) 1317.509,1180.346 ; 1316.147,1195.953 ccw(c1316.828,1194.881) 1317.509,1193.808 ; 1316.655,1175.506 ccw(c1317.336,1174.434) 1318.017,1173.361 ; 1316.747,1207.652 1317.979,1208.435 ccw(c1317.298,1209.506) 1316.617,1210.579 1317.073,1209.795 ; 1317.001,1200.794 1318.233,1201.577 ccw(c1317.552,1202.648) 1316.871,1203.721 1317.327,1202.937 ; 1317.136,1333.379 1318.498,1331.235 1320.642,1332.597 1319.28,1334.741 ; 1317.255,1187.205 1318.487,1187.988 ccw(c1317.806,1189.059) 1317.125,1190.132 1317.581,1189.348 ; 1317.39,1326.521 1318.752,1324.377 1320.896,1325.739 1319.534,1327.883 ; 1317.509,1180.347 1318.741,1181.13 ccw(c1318.06,1182.201) 1317.379,1183.274 1317.835,1182.49 ; 1317.509,1193.809 1318.741,1194.592 ccw(c1318.06,1195.663) 1317.379,1196.736 1317.835,1195.952 ; 1317.592,1266.669 ccw(c1318.273,1265.597) 1318.954,1264.524 1320.186,1265.308 ccw(c1319.505,1266.379) 1318.824,1267.452 1319.28,1266.668 ; 1317.644,1312.932 1319.006,1310.788 1321.15,1312.15 1319.788,1314.294 ; 1317.846,1259.811 ccw(c1318.527,1258.739) 1319.208,1257.666 1320.44,1258.45 ccw(c1319.759,1259.521) 1319.078,1260.594 1319.534,1259.81 ; 1317.898,1306.074 1319.26,1303.93 1321.404,1305.292 1320.042,1307.436 ; 1317.898,1319.536 1319.26,1317.392 1321.404,1318.754 1320.042,1320.898 ; 1318.017,1173.362 1319.249,1174.145 ccw(c1318.568,1175.216) 1317.887,1176.289 1318.343,1175.505 ; 1318.1,1246.222 ccw(c1318.781,1245.15) 1319.462,1244.077 1320.694,1244.861 ccw(c1320.013,1245.932) 1319.332,1247.005 1319.788,1246.221 ; 1318.354,1239.364 ccw(c1319.035,1238.292) 1319.716,1237.219 1320.948,1238.003 ccw(c1320.267,1239.074) 1319.586,1240.147 1320.042,1239.363 ; 1318.354,1252.826 ccw(c1319.035,1251.754) 1319.716,1250.681 1320.948,1251.465 ccw(c1320.267,1252.536) 1319.586,1253.609 1320.042,1252.825 ; 1318.406,1299.089 1319.768,1296.945 1321.912,1298.307 1320.55,1300.451 ; 1318.862,1232.379 ccw(c1319.543,1231.307) 1320.224,1230.234 1321.456,1231.018 ccw(c1320.775,1232.089) 1320.094,1233.162 1320.55,1232.378 ; 1318.889,1332.307 1318.889,1333.669 ; 1319.143,1325.449 1319.143,1326.811 ; 1319.397,1311.86 1319.397,1313.222 ; 1319.651,1305.002 1319.651,1306.364 ; 1319.651,1318.464 1319.651,1319.826 ; 1320.159,1298.017 1320.159,1299.379 ; 1320.592,1209.669 ccw(c1321.273,1208.597) 1321.954,1207.524 ; 1320.846,1202.811 ccw(c1321.527,1201.739) 1322.208,1200.666 ; 1321.1,1189.222 ccw(c1321.781,1188.15) 1322.462,1187.077 ; 1321.354,1182.364 ccw(c1322.035,1181.292) 1322.716,1180.219 ; 1321.354,1195.826 ccw(c1322.035,1194.754) 1322.716,1193.681 ; 1321.862,1175.379 ccw(c1322.543,1174.307) 1323.224,1173.234 ; 1321.954,1207.525 1323.186,1208.308 ccw(c1322.505,1209.379) 1321.824,1210.452 1322.28,1209.668 ; 1322.208,1200.667 1323.44,1201.45 ccw(c1322.759,1202.521) 1322.078,1203.594 1322.534,1202.81 ; 1322.462,1187.078 1323.694,1187.861 ccw(c1323.013,1188.932) 1322.332,1190.005 1322.788,1189.221 ; 1322.47,1333.506 1323.832,1331.362 1325.976,1332.724 1324.614,1334.868 ; 1322.716,1180.22 1323.948,1181.003 ccw(c1323.267,1182.074) 1322.586,1183.147 1323.042,1182.363 ; 1322.716,1193.682 1323.948,1194.465 ccw(c1323.267,1195.536) 1322.586,1196.609 1323.042,1195.825 ; 1322.724,1326.648 1324.086,1324.504 1326.23,1325.866 1324.868,1328.01 ; 1322.926,1266.796 ccw(c1323.607,1265.724) 1324.288,1264.651 1325.52,1265.435 ccw(c1324.839,1266.506) 1324.158,1267.579 1324.614,1266.795 ; 1322.978,1313.059 1324.34,1310.915 1326.484,1312.277 1325.122,1314.421 ; 1323.18,1259.938 ccw(c1323.861,1258.866) 1324.542,1257.793 1325.774,1258.577 ccw(c1325.093,1259.648) 1324.412,1260.721 1324.868,1259.937 ; 1323.224,1173.235 1324.456,1174.018 ccw(c1323.775,1175.089) 1323.094,1176.162 1323.55,1175.378 ; 1323.232,1306.201 1324.594,1304.057 1326.738,1305.419 1325.376,1307.563 ; 1323.232,1319.663 1324.594,1317.519 1326.738,1318.881 1325.376,1321.025 ; 1323.434,1246.349 ccw(c1324.115,1245.277) 1324.796,1244.204 1326.028,1244.988 ccw(c1325.347,1246.059) 1324.666,1247.132 1325.122,1246.348 ; 1323.688,1239.491 ccw(c1324.369,1238.419) 1325.05,1237.346 1326.282,1238.13 ccw(c1325.601,1239.201) 1324.92,1240.274 1325.376,1239.49 ; 1323.688,1252.953 ccw(c1324.369,1251.881) 1325.05,1250.808 1326.282,1251.592 ccw(c1325.601,1252.663) 1324.92,1253.736 1325.376,1252.952 ; 1323.74,1299.216 1325.102,1297.072 1327.246,1298.434 1325.884,1300.578 ; 1324.196,1232.506 ccw(c1324.877,1231.434) 1325.558,1230.361 1326.79,1231.145 ccw(c1326.109,1232.216) 1325.428,1233.289 1325.884,1232.505 ; 1324.223,1332.434 1324.223,1333.796 ; 1324.477,1325.576 1324.477,1326.938 ; 1324.731,1311.987 1324.731,1313.349 ; 1324.985,1305.129 1324.985,1306.491 ; 1324.985,1318.591 1324.985,1319.953 ; 1325.493,1298.144 1325.493,1299.506 ; 1325.926,1209.796 ccw(c1326.607,1208.724) 1327.288,1207.651 ; 1326.18,1202.938 ccw(c1326.861,1201.866) 1327.542,1200.793 ; 1326.434,1189.349 ccw(c1327.115,1188.277) 1327.796,1187.204 ; 1326.688,1182.491 ccw(c1327.369,1181.419) 1328.05,1180.346 ; 1326.688,1195.953 ccw(c1327.369,1194.881) 1328.05,1193.808 ; 1327.196,1175.506 ccw(c1327.877,1174.434) 1328.558,1173.361 ; 1327.288,1207.652 1328.52,1208.435 ccw(c1327.839,1209.506) 1327.158,1210.579 1327.614,1209.795 ; 1327.542,1200.794 1328.774,1201.577 ccw(c1328.093,1202.648) 1327.412,1203.721 1327.868,1202.937 ; 1327.796,1187.205 1329.028,1187.988 ccw(c1328.347,1189.059) 1327.666,1190.132 1328.122,1189.348 ; 1328.05,1180.347 1329.282,1181.13 ccw(c1328.601,1182.201) 1327.92,1183.274 1328.376,1182.49 ; 1328.05,1193.809 1329.282,1194.592 ccw(c1328.601,1195.663) 1327.92,1196.736 1328.376,1195.952 ; 1328.439,1333.379 1329.801,1331.235 1331.945,1332.597 1330.583,1334.741 ; 1328.558,1173.362 1329.79,1174.145 ccw(c1329.109,1175.216) 1328.428,1176.289 1328.884,1175.505 ; 1328.693,1326.521 1330.055,1324.377 1332.199,1325.739 1330.837,1327.883 ; 1328.895,1266.669 ccw(c1329.576,1265.597) 1330.257,1264.524 1331.489,1265.308 ccw(c1330.808,1266.379) 1330.127,1267.452 1330.583,1266.668 ; 1328.947,1312.932 1330.309,1310.788 1332.453,1312.15 1331.091,1314.294 ; 1329.149,1259.811 ccw(c1329.83,1258.739) 1330.511,1257.666 1331.743,1258.45 ccw(c1331.062,1259.521) 1330.381,1260.594 1330.837,1259.81 ; 1329.201,1306.074 1330.563,1303.93 1332.707,1305.292 1331.345,1307.436 ; 1329.201,1319.536 1330.563,1317.392 1332.707,1318.754 1331.345,1320.898 ; 1329.403,1246.222 ccw(c1330.084,1245.15) 1330.765,1244.077 1331.997,1244.861 ccw(c1331.316,1245.932) 1330.635,1247.005 1331.091,1246.221 ; 1329.657,1239.364 ccw(c1330.338,1238.292) 1331.019,1237.219 1332.251,1238.003 ccw(c1331.57,1239.074) 1330.889,1240.147 1331.345,1239.363 ; 1329.657,1252.826 ccw(c1330.338,1251.754) 1331.019,1250.681 1332.251,1251.465 ccw(c1331.57,1252.536) 1330.889,1253.609 1331.345,1252.825 ; 1329.709,1299.089 1331.071,1296.945 1333.215,1298.307 1331.853,1300.451 ; 1330.165,1232.379 ccw(c1330.846,1231.307) 1331.527,1230.234 1332.759,1231.018 ccw(c1332.078,1232.089) 1331.397,1233.162 1331.853,1232.378 ; 1330.192,1332.307 1330.192,1333.669 ; 1330.446,1325.449 1330.446,1326.811 ; 1330.7,1311.86 1330.7,1313.222 ; 1330.954,1305.002 1330.954,1306.364 ; 1330.954,1318.464 1330.954,1319.826 ; 1331.462,1298.017 1331.462,1299.379 ; 1331.895,1209.669 ccw(c1332.576,1208.597) 1333.257,1207.524 ; 1332.149,1202.811 ccw(c1332.83,1201.739) 1333.511,1200.666 ; 1332.403,1189.222 ccw(c1333.084,1188.15) 1333.765,1187.077 ; 1332.657,1182.364 ccw(c1333.338,1181.292) 1334.019,1180.219 ; 1332.657,1195.826 ccw(c1333.338,1194.754) 1334.019,1193.681 ; 1333.165,1175.379 ccw(c1333.846,1174.307) 1334.527,1173.234 ; 1333.257,1207.525 1334.489,1208.308 ccw(c1333.808,1209.379) 1333.127,1210.452 1333.583,1209.668 ; 1333.511,1200.667 1334.743,1201.45 ccw(c1334.062,1202.521) 1333.381,1203.594 1333.837,1202.81 ; 1333.765,1187.078 1334.997,1187.861 ccw(c1334.316,1188.932) 1333.635,1190.005 1334.091,1189.221 ; 1334.019,1180.22 1335.251,1181.003 ccw(c1334.57,1182.074) 1333.889,1183.147 1334.345,1182.363 ; 1334.019,1193.682 1335.251,1194.465 ccw(c1334.57,1195.536) 1333.889,1196.609 1334.345,1195.825 ; 1334.527,1173.235 1335.759,1174.018 ccw(c1335.078,1175.089) 1334.397,1176.162 1334.853,1175.378 ; 522.73,779.73 522.73,782.27 525.27,782.27 525.27,779.73 522.73,779.73 ; 526.73,773.73 526.73,776.27 529.27,776.27 529.27,773.73 526.73,773.73 ; 527.73,779.73 527.73,782.27 530.27,782.27 530.27,779.73 527.73,779.73 ; 531.73,773.73 531.73,776.27 534.27,776.27 534.27,773.73 531.73,773.73 ; 532.73,779.73 532.73,782.27 535.27,782.27 535.27,779.73 532.73,779.73 ; 583.73,742.73 583.73,745.27 586.27,745.27 586.27,742.73 583.73,742.73 ; 583.73,747.73 583.73,750.27 586.27,750.27 586.27,747.73 583.73,747.73 ; 583.73,753.73 583.73,756.27 586.27,756.27 586.27,753.73 583.73,753.73 ; 583.73,758.73 583.73,761.27 586.27,761.27 586.27,758.73 583.73,758.73 ; 588.73,742.73 588.73,745.27 591.27,745.27 591.27,742.73 588.73,742.73 ; 588.73,747.73 588.73,750.27 591.27,750.27 591.27,747.73 588.73,747.73 ; 588.73,753.73 588.73,756.27 591.27,756.27 591.27,753.73 588.73,753.73 ; 588.73,758.73 588.73,761.27 591.27,761.27 591.27,758.73 588.73,758.73 ; 593.73,742.73 593.73,745.27 596.27,745.27 596.27,742.73 593.73,742.73 ; 593.73,747.73 593.73,750.27 596.27,750.27 596.27,747.73 593.73,747.73 ; 593.73,753.73 593.73,756.27 596.27,756.27 596.27,753.73 593.73,753.73 ; 593.73,758.73 593.73,761.27 596.27,761.27 596.27,758.73 593.73,758.73 ; 613.73,746.73 613.73,749.27 616.27,749.27 616.27,746.73 613.73,746.73 ; 613.73,752.73 613.73,755.27 616.27,755.27 616.27,752.73 613.73,752.73 ; 618.73,746.73 618.73,749.27 621.27,749.27 621.27,746.73 618.73,746.73 ; 618.73,752.73 618.73,755.27 621.27,755.27 621.27,752.73 618.73,752.73 ; 623.73,746.73 623.73,749.27 626.27,749.27 626.27,746.73 623.73,746.73 ; 623.73,752.73 623.73,755.27 626.27,755.27 626.27,752.73 623.73,752.73 ; 624.968,777.573 627.508,777.573 627.508,780.113 624.968,780.113 624.968,777.573 ; 625.077,770.879 627.598,770.57 627.907,773.091 625.386,773.4 625.077,770.879 ; 629.847,777.813 632.348,777.372 632.789,779.873 630.288,780.314 629.847,777.813 ; 629.986,771.142 632.415,770.399 633.158,772.828 630.729,773.571 629.986,771.142 ; 634.77,778.084 637.157,777.215 638.026,779.602 635.639,780.471 634.77,778.084 ; 634.944,771.43 637.207,770.277 638.36,772.54 636.097,773.693 634.944,771.43 ; 637.77,676.234 ccw(c638.204,675.04) 638.638,673.847 640.01,674.346 ccw(c639.576,675.54) 639.142,676.733 637.77,676.234 ; 639.743,778.378 641.943,777.108 643.213,779.308 641.013,780.578 639.743,778.378 ; 639.953,771.735 641.982,770.206 643.511,772.235 641.482,773.764 639.953,771.735 ; 642.703,676.025 ccw(c643.338,674.925) 643.973,673.825 645.237,674.555 ccw(c644.602,675.655) 643.967,676.755 642.703,676.025 ; 645.531,778.814 647.476,777.181 649.109,779.126 647.164,780.759 645.531,778.814 ; 645.779,772.175 647.511,770.317 649.369,772.049 647.637,773.907 645.779,772.175 ; 651.754,778.745 653.387,776.8 655.332,778.433 653.699,780.378 651.754,778.745 ; 652.04,772.105 653.423,769.974 655.554,771.357 654.171,773.488 652.04,772.105 ; 657.269,779.435 658.539,777.235 660.739,778.505 659.469,780.705 657.269,779.435 ; 657.593,772.785 658.585,770.447 660.923,771.439 659.931,773.777 657.593,772.785 ; 662.583,779.602 663.452,777.215 665.839,778.084 664.97,780.471 662.583,779.602 ; 662.942,772.937 663.513,770.462 665.988,771.033 665.417,773.508 662.942,772.937 ; 668.074,780 668.515,777.499 671.016,777.94 670.575,780.441 668.074,780 ; 668.464,773.314 668.597,770.777 671.134,770.91 671.001,773.447 668.464,773.314 ; 674.244,777.573 674.244,780.113 676.784,780.113 676.784,777.573 674.244,777.573 ; 674.353,770.879 674.662,773.4 677.183,773.091 676.874,770.57 674.353,770.879 ; 808,1268.02 cw(c808,1269.29) 808,1270.56 809.46,1270.56 cw(c809.46,1269.29) 809.46,1268.02 808,1268.02 ; 856.736,1268.56 ccw(c858.006,1268.56) 859.276,1268.56 859.276,1270.02 ccw(c858.006,1270.02) 856.736,1270.02 856.736,1268.56 ; 857.244,1248.113 ccw(c858.514,1248.113) 859.784,1248.113 859.784,1249.573 ccw(c858.514,1249.573) 857.244,1249.573 857.244,1248.113 ; 857.498,1254.717 ccw(c858.768,1254.717) 860.038,1254.717 860.038,1256.177 ccw(c858.768,1256.177) 857.498,1256.177 857.498,1254.717 ; 858.006,1234.27 ccw(c859.276,1234.27) 860.546,1234.27 860.546,1235.73 ccw(c859.276,1235.73) 858.006,1235.73 858.006,1234.27 ; 859.736,1211.56 ccw(c861.006,1211.56) 862.276,1211.56 862.276,1213.02 ccw(c861.006,1213.02) 859.736,1213.02 859.736,1211.56 ; 860.244,1191.113 ccw(c861.514,1191.113) 862.784,1191.113 862.784,1192.573 ccw(c861.514,1192.573) 860.244,1192.573 860.244,1191.113 ; 860.498,1197.717 ccw(c861.768,1197.717) 863.038,1197.717 863.038,1199.177 ccw(c861.768,1199.177) 860.498,1199.177 860.498,1197.717 ; 861.006,1177.27 ccw(c862.276,1177.27) 863.546,1177.27 863.546,1178.73 ccw(c862.276,1178.73) 861.006,1178.73 861.006,1177.27 ; 1074,519 ccw(c1073,519) 1074,519 ; 1134,555 1136,555 1136,557 1134,557 1134,555 ; 1134,562 1136,562 1136,564 1134,564 1134,562